# Allegro board ColpittsOscillator.brd
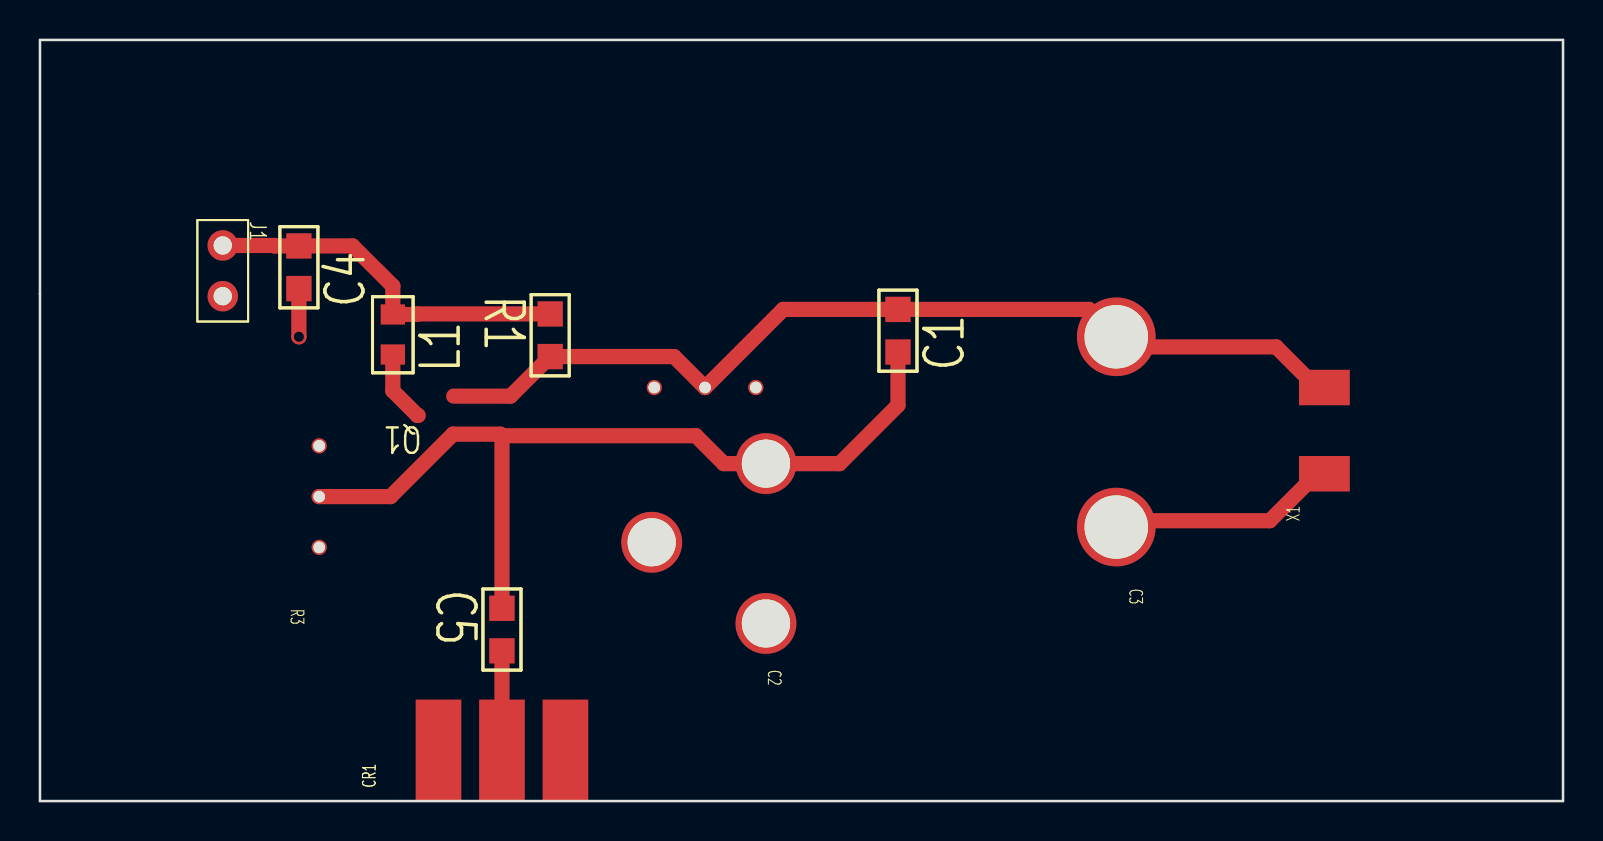
[diagram p0: board, top side]
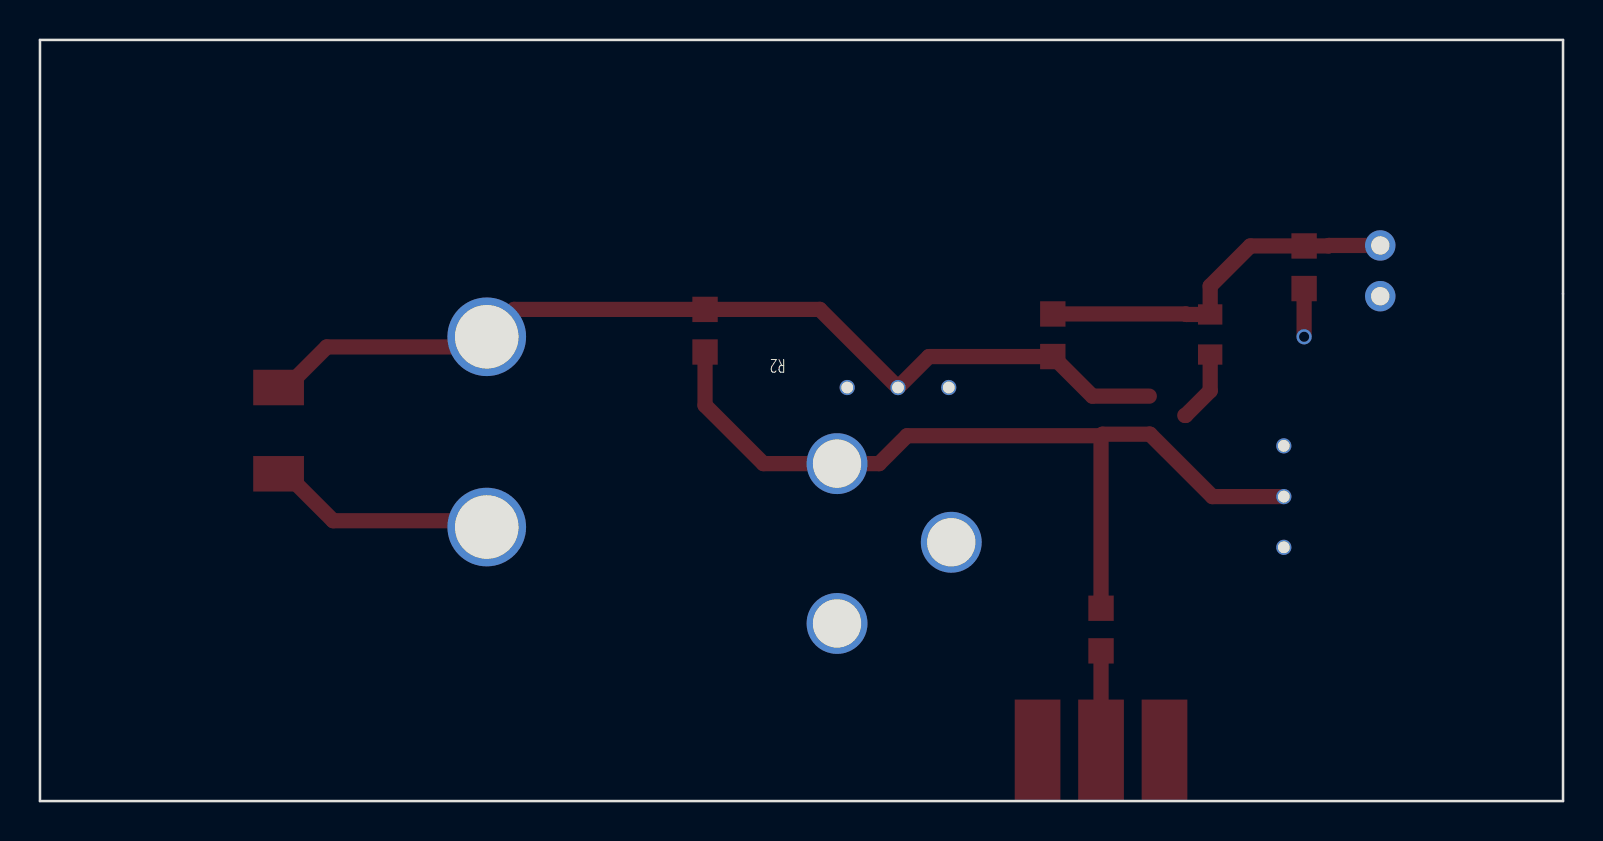
[diagram p1: board, bottom side, seen from below]

Outline 76.2 x 38.1 mm; copper layers: TOP, BOTTOM. Coordinates in mm from the lower left corner of the outline.
Outline path: 0,38.1 0,0 76.2,0 76.2,38.1 0,38.1

## Design rules (mm)
constraint set DEFAULT: min track width 0.305

## Placement (name value [footprint] x y rotation side)
C1  24pF  [SMC0805]  42.93 22.48 90 top
C2  24pF  [MYSTERY_VARCAP_10-47PF]  36.32 16.89 270 top
C3  6pf  [MYSTERY_VARCAP_2_8PF]  53.85 23.24 270 top
C4  1n  [SMC0805]  12.95 25.65 90 top
C5  1n  [SMC0805]  23.11 9.65 270 top
CR1  COAX RECEPTACLE  [MOLEX_SMA]  23.11 0 90 top
J1  HEADER 2  [JUMPER2]  9.14 27.81 270 top
L1  10uH  [SML0805]  17.65 22.35 90 top
Q1  MPS2222  [SOT23]  19.81 19.3 180 top
R1  RESISTOR  [SMR0805]  25.53 24.38 270 top
R2  POT  [POT_BOURNS_3310]  33.27 20.7 0 bottom
R3  POT  [POT_BOURNS_3310]  13.97 15.24 270 top
X1  QZS10MEG  [XTAL_ABM3]  64.26 18.54 90 top

## Library data of the parts
C1 C4 C5 = C
C2 = C_var_0
C3 = C_var
CR1 = COAX RECEPTACLE
J1 = HEADER 2: User Part Number: ***
L1 = L
Q1 = MPS2222
R1 = RESISTOR
R2 R3 = POT
X1 = QZS10MEG

## Footprints (pads in the part's own frame, mm; a bottom-side part is the same pattern mirrored in y, then rotated)
JUMPER2
  round 1.524 hole 0.914: 1(0,0) 2(2.54,0)
MOLEX_SMA
  rect 5.08x2.286 smd: 1(2.54,3.175) 2(2.54,0) 3(2.54,-3.175)
MYSTERY_VARCAP_2_8PF
  round 3.937 hole 3.175 unplated: (0,0) (9.525,0)
MYSTERY_VARCAP_10-47PF
  round 3.048 hole 2.413: 1(0,0) 2(8.001,0) 3(3.937,-5.715)
POT_BOURNS_3310
  round 0.762 hole 0.584: 1(-2.54,0) 2(0,0) 3(2.54,0)
SMC0805
  rect 1.27x1.27 smd: 1(0,0) 2(2.134,0)
SML0805
  rect 1.016x1.219 smd: 1(0,0) 2(2.007,0)
SMR0805
  rect 1.27x1.27 smd: 1(0,0) 2(2.134,0)
SOT23
  rect 0.508x0.432 smd: 1(-0.889,0.94) 2(-0.889,-0.965) 3(0.889,0)
XTAL_ABM3
  rect 1.778x2.54 smd: 1(-2.159,0) 2(2.159,0)

## Nets
0: C2.3 C4.1 CR1.1 CR1.3(SHIELD 2) J1.2 R2.1 R3.1 X1.1
N00146: C1.2 Q1.2 R1.2 R2.2(WIPER) X1.2
N00165: C1.1 C2.1 C5.1 Q1.1(E) R3.2(WIPER)
N00539: L1.1 Q1.3
N00611: C4.2 J1.1 L1.2 R1.1
N00843: C5.2 CR1.2

Pads without a net: C2 2; R2 3; R3 3

## Via types
v1: diameter 0.762, hole 0.508, TOP to BOTTOM, 1 via

## Routing (per net, layer and track width the routed paths; a pad name or vN(x,y) marks a point on that pad's centre or on a via; arc(x,y) is an arc through that point)
0: length 13.9
  TOP w0.762: X1.1 63.88,16.38 61.53,14.03 53.78,14.03 ; C4.1 v1(12.95,23.24)
N00146: length 48.3
  TOP w0.762: X1.2 63.88,20.7 61.85,22.73 54.36,22.73 52.48,24.61 C1.2 37.19,24.61 R2.2 31.72,22.25 R1.2 23.55,20.27 Q1.2
N00165: length 43.4
  TOP w0.762: C1.1 42.93,19.81 40,16.89 C2.1 34.21,16.89 32.82,18.29 23.11,18.29 ; C5.1 23.11,18.29 ; 23.11,18.29 23.04,18.36 Q1.1 20.66,18.36 17.54,15.24 R3.2
N00539: length 3.6
  TOP w0.762: Q1.3 18.88,19.3 17.65,20.54 L1.1
N00611: length 18.7
  TOP w0.762: J1.1 11.71,27.81 11.73,27.79 C4.2 15.65,27.79 17.65,25.78 L1.2 18.85,24.36 18.87,24.38 R1.1
N00843: length 5
  TOP w0.762: CR1.2 C5.2
